# EAGLE board PCB-ARD-BOS2 (EAGLE 6.5.0)
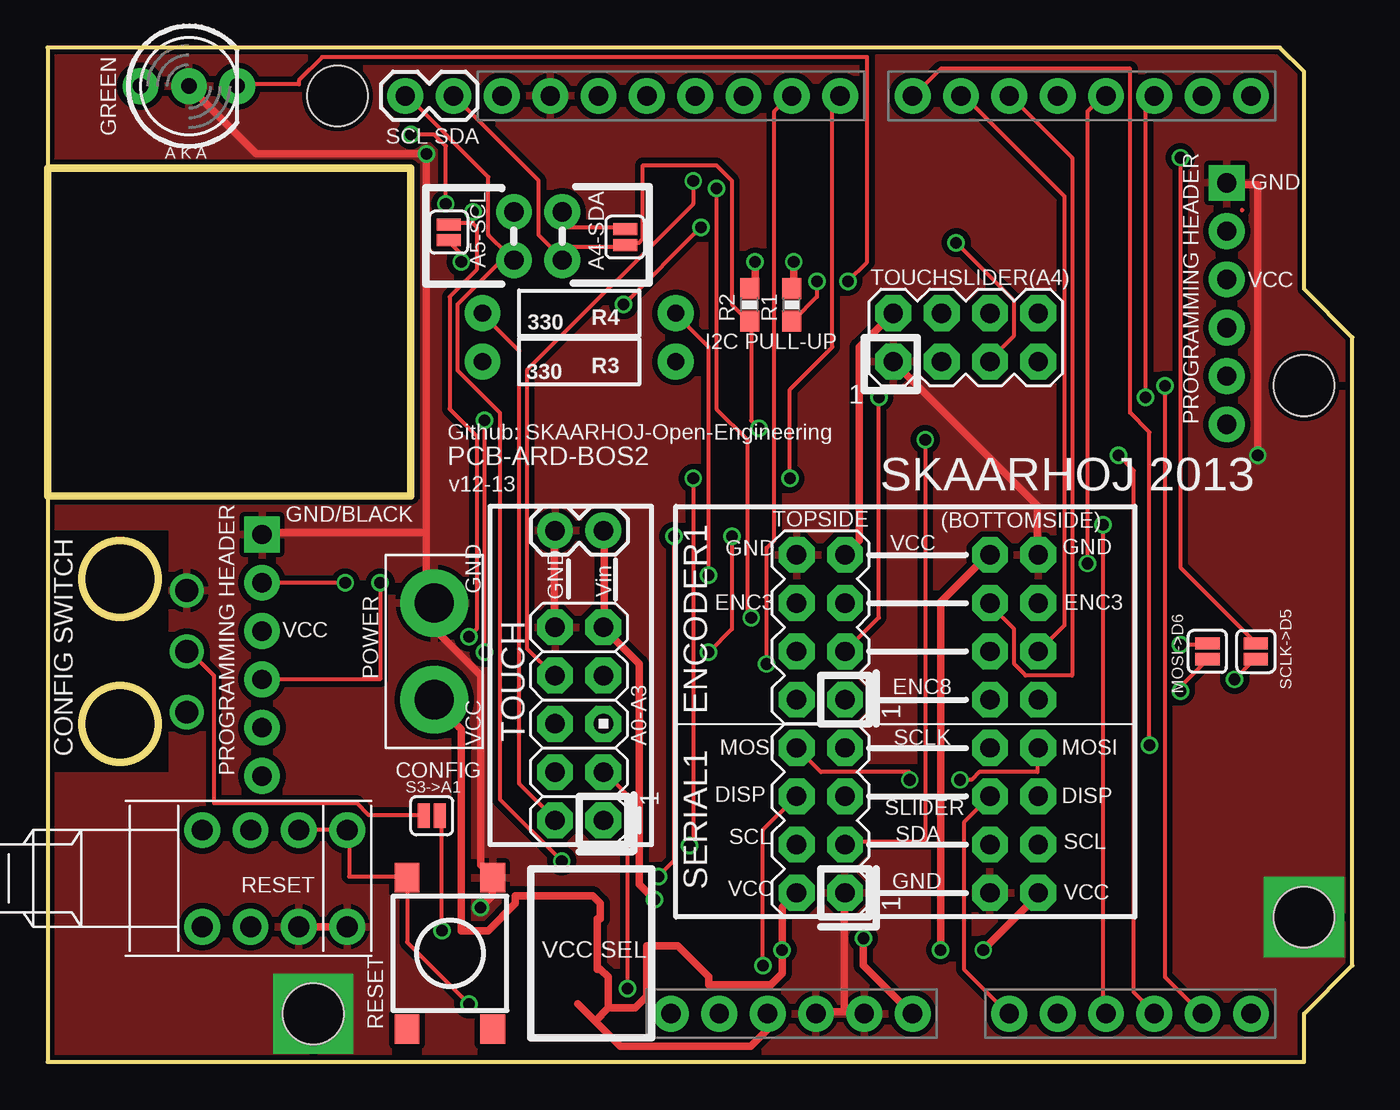
[diagram p0: board, top side]
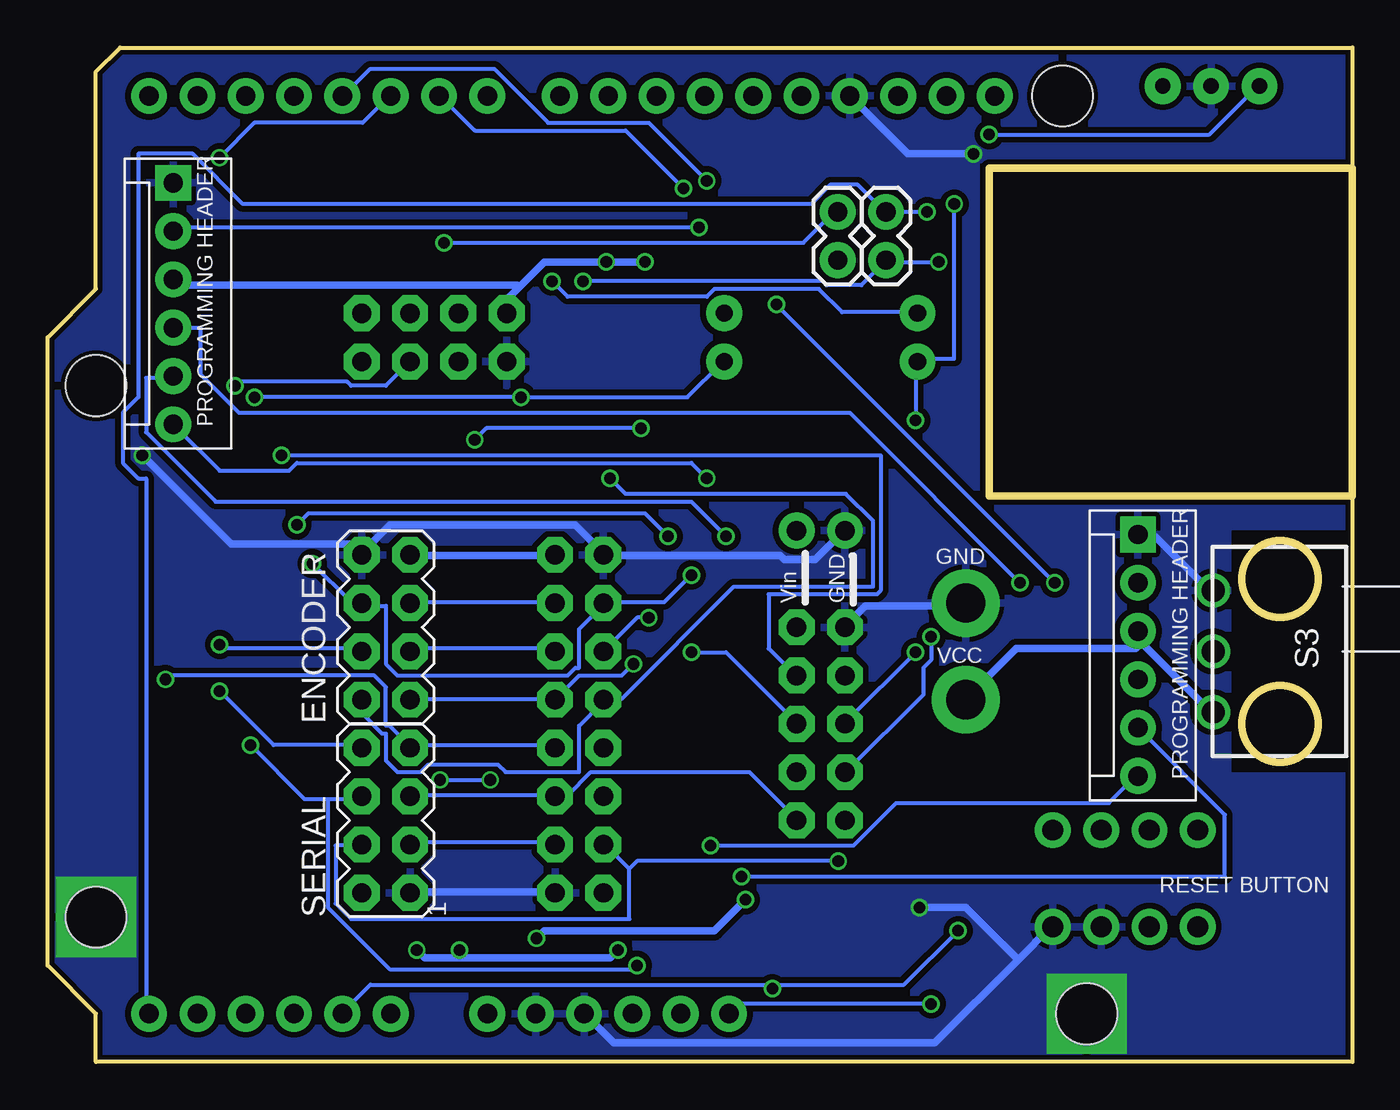
[diagram p1: board, bottom side, seen from below]

Size 68.58 x 53.34 mm. Coordinates in mm from the lower left corner, seen from the top.
Outline: 0,29.77 19.1,29.77 19.1,46.99 0,46.99 0,29.77
Outline: 0,0 0,29.77
Copper layers (1*16): Top 0.035mm / dielectric 1.5mm / Bottom 0.035mm
Design rules "Fusion_eagle_rule_v1.1": minimum track width 6mil, minimum drill 12mil, track to track 6mil, track to pad 6mil, pad to pad 6mil, via to via 6mil, smd to smd 0mil, copper to edge 10mil, drill to drill 10mil, minimum pad ring 10mil, minimum via ring 6mil, stop-mask expansion 2mil, vias tented up to drill 100mil, thermal gap 10mil
Net classes: 0 default: width 0.203 mm, drill 0.61 mm, clearance 0.203 mm; 1 Power: width 0.406 mm, drill 0.61 mm, clearance 0.305 mm
Holes 3.2 mm at 13.97,2.54
tRestrict: area 0,29.6 to 19.6,47.2; area 0,15.2 to 6.3,27.9
bRestrict: area 0,29.6 to 19.6,47.2; area 0,15.2 to 6.3,27.9
Milling: area 1.8,23.4 to 5.8,27.4; area 1.8,15.8 to 5.8,19.8

## Footprints (pad centres in the part's own frame; a part is rotated, then mirrored left to right if it is on the bottom)
2X4 = drill 1.016 pad 1.88 octagon: 1 -3.81,-1.27; 2 -3.81,1.27; 3 -1.27,-1.27; 4 -1.27,1.27; 5 1.27,-1.27; 6 1.27,1.27; 7 3.81,-1.27; 8 3.81,1.27
MOLEX-1X6 = drill 1.016 pad 1.88 square: 1 0,0 | drill 1.016 pad 1.88: 2 2.54,0; 3 5.08,0; 4 7.62,0; 5 10.16,0; 6 12.7,0
1X02 = drill 1.016 pad 1.88: 1 0,0; 2 2.54,0
AVR_ICSP = drill 1.016 pad 1.88 octagon: 1 -1.27,5.08; 2 1.27,5.08; 3 -1.27,2.54; 4 1.27,2.54; 5 -1.27,0; 6 1.27,0; 7 -1.27,-2.54; 8 1.27,-2.54; 9 -1.27,-5.08; 10 1.27,-5.08
1X02_XTRA_BIG = drill 2.057 pad 3.556: 1 -2.54,0; 2 2.54,0
SJ_2S = smd 0.635 x 1.27: 1 -0.412,0; 2 0.412,0
0603-RES = smd 1.1 x 1: 1 -0.85,0; 2 0.85,0
AXIAL-0.4 = drill 0.9 pad 1.88: P$1 -5.08,0; P$2 5.08,0
PUSHBUTTON = drill 1.1 pad 1.88: 1 2.54,2.54; 2 2.54,-2.54; 3 -2.54,2.54; 4 -2.54,-2.54
TECONNECTIVITY-DPST = drill 1.2: P$1 3,3.2; P$2 3,0; P$3 3,-3.2
TACTILE_SWITCH_TALL = smd 1.55 x 1.3: A1 -3.975,-2.25; A2 3.975,-2.25; B1 -3.975,2.25; B2 3.975,2.25
DUEMILANOVE_VIAS = drill 1.016 pad 1.88: 3.3V 50.8,13.97; 5V 50.8,16.51; A0 50.8,29.21; A1 50.8,31.75; A2 50.8,34.29; A3 50.8,36.83; A4 50.8,39.37; A5 50.8,41.91; AREF 2.54,2.54; D2 2.54,36.83; D3 2.54,34.29; D4 2.54,31.75; D5 2.54,29.21; D6 2.54,26.67; D7 2.54,24.13; D8 2.54,20.32; D9 2.54,17.78; D10 2.54,15.24; D11 2.54,12.7; D12 2.54,10.16; D13 2.54,7.62; GND@0 50.8,19.05; GND@1 50.8,21.59; GND@2 2.54,5.08; RES 50.8,11.43; RX 2.54,41.91; TX 2.54,39.37; VIN 50.8,24.13
LED5MM-BICOLOR = drill 0.813 pad 1.88: A2 2.54,0; A3 -2.54,0; K1 0,0
ARDUINO-OUTLINE = hole 3.2: 15.24,50.8; 66.04,35.56; 66.04,7.62

## Placement (x,y rotation side)
ENCODER  M04X2  [2X4]  50.8,22.86 90 bottom
ENCODER1  M04X2  [2X4]  40.64,22.86 90 top
JP1  [MOLEX-1X6]  61.98,46.23 270 bottom
JP2  [MOLEX-1X6]  11.27,27.74 270 bottom
JP3  [1X02]  21.34,50.8 180 top
JP4  [1X02]  26.67,27.94 0 top
JP5  [1X02]  24.51,42.16 90 bottom
JP6  [1X02]  27.05,42.16 90 bottom
JP7  M05X2PTH  [AVR_ICSP]  27.94,17.78 180 top
JP8  [1X02_XTRA_BIG]  20.32,21.59 270 top
MOSI->D6  SOLDERJUMPERNC  [SJ_2S]  60.96,21.59 90 top
R1  1K5  [0603-RES]  39.12,39.81 90 top
R2  1K5  [0603-RES]  36.89,39.81 90 top
R3  330  [AXIAL-0.4]  27.94,36.83 0 top
R4  330  [AXIAL-0.4]  27.94,39.37 0 top
S1  [PUSHBUTTON]  13.21,9.65 270 top
S2  [PUSHBUTTON]  10.67,9.65 270 top
S3  SWITCH-DPST  [TECONNECTIVITY-DPST]  4.32,21.59 180 bottom
S3->A1  SOLDERJUMPERNC  [SJ_2S]  20.19,12.95 0 top
S3->A2  SOLDERJUMPERNC  [SJ_2S]  21.08,43.62 90 top
S3->A3  SOLDERJUMPERNC  [SJ_2S]  30.35,43.37 90 top
S4  SWITCH-MOMENTARY-2  [TACTILE_SWITCH_TALL]  21.15,5.71 90 top
SCLK->D5  SOLDERJUMPERNC  [SJ_2S]  63.5,21.59 270 top
SERIAL  M04X2  [2X4]  50.8,12.7 90 bottom
SERIAL1  M04X2  [2X4]  40.64,12.7 90 top
TOUCHSLIDER(A4)  M04X2  [2X4]  48.26,38.1 0 top
U1  ARDUINO_SHIELDNO_SILK  [DUEMILANOVE_VIAS]  21.34,53.34 270 top
U$7  LEDBICOLOR-AKA  [LED5MM-BICOLOR]  7.43,51.31 0 top
U$8  [ARDUINO-OUTLINE]  0,0 0 top

## Library data of the parts
ENCODER ENCODER1 JP1-JP8 MOSI->D6 R1-R4 S3->A1-S3->A3 S4 SCLK->D5 SERIAL SERIAL1 TOUCHSLIDER(A4) U1 U$8 = SparkFun
S1-S3 U$7 = SKAARHOJ

## Nets
5V [Power]: ENCODER1.7 ENCODER.7 JP1.3 JP2.3 JP8.2 R1.2 R2.2 S3.P$1 SERIAL1.2 SERIAL.2 TOUCHSLIDER(A4).2 U1.5V
A0: JP7.1 SERIAL1.5 SERIAL.5 U1.A0
A1: JP7.3 S3->A1.2 U1.A1
A2: JP7.5 U1.A2
A3: JP7.7 U1.A3
A4: JP6.2 S3->A3.2 TOUCHSLIDER(A4).5 U1.A4
A5: JP5.2 JP7.4 S3->A2.2 U1.A5
D2: ENCODER1.3 ENCODER.3 R3.P$2 U1.D2
D3: ENCODER1.6 ENCODER.6 R4.P$2 U1.D3
D4: JP7.8 U1.D4
D5: ENCODER1.5 ENCODER.5 SCLK->D5.1 U1.D5
D6: ENCODER1.4 ENCODER.4 MOSI->D6.2 U1.D6
D7: SERIAL1.6 SERIAL.6 U1.D7
D8: ENCODER1.2 ENCODER.2 U1.D8
D9: ENCODER1.1 ENCODER.1 U1.D9
GND [Power]: ENCODER1.8 ENCODER.8 JP1.1 JP2.1 JP4.1 JP7.10 JP8.1 S1.1 S2.1 S3.P$3 S4.A2 SERIAL1.1 SERIAL.1 TOUCHSLIDER(A4).1 U1.GND@0 U1.GND@1 U1.GND@2 U$7.K1
I2C_SCL: JP3.2 JP5.1 R1.1 S3->A2.1 SERIAL1.4 SERIAL.4
I2C_SDA: JP3.1 JP6.1 R2.1 S3->A3.1 SERIAL1.3 SERIAL.3
MOSI: MOSI->D6.1 SERIAL1.8 SERIAL.8
N$1: JP1.2 JP2.2
N$2: S3->A1.1 S3.P$2
N$7: JP7.2 R4.P$1 U$7.A2
N$8: JP7.6 R3.P$1 U$7.A3
N$33: JP1.4 JP2.4
N$34: JP1.5 JP2.5
N$45: JP1.6 JP2.6
RESET: S1.3 S2.3 S4.B2 U1.RES
SCLK: SCLK->D5.2 SERIAL1.7 SERIAL.7
VIN [Power]: JP4.2 JP7.9 U1.VIN

## Tracks (layer width: path | path; a pad name or v marks a point on that pad's centre or on a via)
5V  (via drill 0.61)
  Top 0.406: 28.89,7.52 28.89,4.88 29.06,4.88 29.46,4.47 29.46,2.85 | 28.89,7.52 | v37.19,42.06 37.19,41.05 36.98,40.84 R2.2 | v39.22,42.06 39.22,40.84 R1.2 | ENCODER1.7 42.67,27.43 42.67,37.59 TOUCHSLIDER(A4).2 | JP8.2 20.32,18.9 21.74,17.48 21.74,6.91 23.16,6.91 24.59,8.33 24.59,8.74 28.65,8.74 29.06,8.33 29.06,7.52 28.89,7.52 | SERIAL1.2 38.61,8.13 v38.61,5.89 38.61,4.67 38,4.06 34.75,4.06 34.75,4.47 33.12,6.1 31.5,6.1 31.5,3.45 30.89,2.85 29.46,2.85 | v49.17,5.89 52.02,8.74 SERIAL.2 | v46.94,5.89 46.94,24.18 49.38,26.62 ENCODER.7 | U1.5V 37.85,1.71 36.96,0.83 30.1,0.83 28.77,2.15 | 28.77,2.15 27.88,3.05 | 29.46,2.85 28.77,2.15
  Bottom 0.406: ENCODER1.7 42.06,26.62 49.38,26.62 ENCODER.7 | v37.19,42.06 v39.22,42.06 42.47,42.06 43.79,40.74 | 43.79,40.74 44.3,40.23 44.3,39.42 TOUCHSLIDER(A4).2 | JP1.3 61.98,41.05 61.77,40.84 43.89,40.84 43.79,40.74 | S3.P$1 7.52,18.49 11.18,22.15 11.18,22.55 JP2.3 11.18,21.95 11.38,21.74 17.68,21.74 20.32,19.1 JP8.2 | v49.17,5.89 48.77,5.49 46.94,5.49 | 46.94,5.49 39.01,5.49 v38.61,5.89 | 46.94,5.49 v46.94,5.89
A0
  Top 0.203: SERIAL.5 48.16,12.6 48.16,4.88 50.39,2.64 U1.A0
  Bottom 0.203: JP7.1 29.26,12.8 31.7,15.24 40.03,15.24 41.25,14.02 41.86,14.02 SERIAL1.5 42.06,14.02 49.38,14.02 SERIAL.5
A1  (via drill 0.61)
  Top 0.203: v20.73,6.91 20.73,12.8 S3->A1.2 | v30.48,3.86 30.48,14.02 29.26,15.24 JP7.3
  Bottom 0.203: v20.73,6.91 23.57,4.06 30.48,4.06 | 30.48,4.06 51.61,4.06 53.03,2.64 U1.A1 | 30.48,4.06 v30.48,3.86
A2  (via drill 0.61)
  Top 0.203: v34.75,21.54 35.97,22.76 v35.97,27.64 | v55.47,28.25 55.47,2.64 U1.A2
  Bottom 0.203: v34.75,21.54 32.92,21.54 29.26,17.88 JP7.5 | v35.97,27.64 37.19,28.85 54.86,28.85 v55.47,28.25
A3  (via drill 0.61)
  Top 0.203: v56.29,31.9 57.1,31.09 57.1,3.66 58.12,2.64 U1.A3
  Bottom 0.203: v56.29,31.9 24.79,31.9 24.79,24.79 24.99,24.59 30.68,24.59 30.68,21.74 29.26,20.32 JP7.7
A4  (via drill 0.61)
  Top 0.203: S3->A3.2 30.28,43.89 27.23,43.89 27.23,44.7 JP6.2 | v58.73,35.56 58.73,4.47 60.55,2.64 U1.A4 | v47.75,43.08 50.8,40.03 50.8,38.2 49.58,36.98 TOUCHSLIDER(A4).5
  Bottom 0.203: v58.73,35.56 58.52,35.76 52.83,35.76 52.63,35.56 50.8,35.56 TOUCHSLIDER(A4).5 | v47.75,43.08 28.85,43.08 27.23,44.7 JP6.2
A5  (via drill 0.61)
  Top 0.203: 22.35,44.09 21.13,44.09 S3->A2.2 | v22.35,44.7 22.35,44.09 | v22.15,22.35 22.55,22.76 22.55,32.92 21.13,34.34 21.13,40.23 22.55,41.66 22.55,43.89 22.35,44.09
  Bottom 0.203: v22.35,44.7 JP5.2 24.59,44.7 26.01,46.13 27.43,46.13 28.45,45.11 58.32,45.11 60.96,47.75 63.8,47.75 63.8,34.95 64.62,34.14 64.62,31.5 63.8,30.68 63.4,30.68 63.4,2.64 U1.A5 | v22.15,22.35 22.15,21.13 22.55,20.73 22.55,19.3 26.62,15.24 JP7.4
D2  (via drill 0.61)
  Top 0.203: v43.69,34.95 43.69,23.37 ENCODER1.3 | v57.71,34.95 57.71,50.39 58.12,50.8 U1.D2
  Bottom 0.203: R3.P$2 33.12,36.78 34.95,34.95 v43.69,34.95 v57.71,34.95 | ENCODER.3 49.38,21.74 42.06,21.74 ENCODER1.3
D3  (via drill 0.61)
  Top 0.203: v34.75,25.6 34.75,37.59 33.12,39.22 R4.P$2 | v54.66,26.21 54.66,49.99 55.47,50.8 U1.D3
  Bottom 0.203: v34.75,25.6 36.17,24.18 39.22,24.18 ENCODER1.6 39.42,23.98 40.64,22.76 40.64,20.73 40.84,20.73 41.25,20.32 50.19,20.32 50.8,20.93 50.8,23.98 52.02,23.98 ENCODER.6 52.22,24.18 52.63,24.18 v54.66,26.21
D4  (via drill 0.61)
  Top 0.203: v33.93,46.33 33.93,45.11 25.2,36.37 25.2,21.74 26.62,20.32 JP7.8
  Bottom 0.203: v33.93,46.33 36.98,49.38 42.27,49.38 45.11,52.22 51.61,52.22 53.03,50.8 U1.D4
D5  (via drill 0.61)
  Top 0.203: v59.54,47.55 59.54,26.01 63.4,22.15 SCLK->D5.1 | ENCODER.5 49.58,23.98 50.8,22.76 50.8,20.93 51.41,20.32 53.85,20.32 53.85,47.55 50.6,50.8 U1.D5
  Bottom 0.203: ENCODER1.5 42.06,24.18 49.38,24.18 ENCODER.5 | v59.54,47.55 57.71,49.38 52.02,49.38 50.6,50.8 U1.D5
D6  (via drill 0.61)
  Top 0.203: v59.54,21.95 60.96,21.95 MOSI->D6.2 | v36.98,23.37 36.78,23.57 36.78,32.72 35.15,34.34 v35.15,45.92 | ENCODER.4 53.44,22.96 53.44,45.52 48.16,50.8 U1.D6
  Bottom 0.203: v59.54,21.95 59.33,21.74 52.22,21.74 ENCODER.4 | ENCODER1.4 37.59,23.37 v36.98,23.37 | v35.15,45.92 38.2,48.97 46.13,48.97 47.95,50.8 U1.D6
D7  (via drill 0.61)
  Top 0.203: SERIAL1.6 37.59,12.19 v37.59,5.08 | v57.91,16.66 57.91,33.12 56.9,34.14 56.9,52.22 46.94,52.22 45.52,50.8 U1.D7
  Bottom 0.203: v37.59,5.08 37.8,4.88 50.6,4.88 53.85,8.13 53.85,13.82 | 53.85,13.82 52.22,13.82 SERIAL.6 | v57.91,16.66 55.07,13.82 53.85,13.82
D8  (via drill 0.61)
  Top 0.203: U1.D8 41.25,50.39 41.25,37.59 39.01,35.36 v39.01,30.68
  Bottom 0.203: ENCODER.2 52.02,18.9 52.02,18.29 51,17.27 50.8,17.27 50.8,15.85 50.19,15.24 48.97,15.24 48.56,15.65 44.91,15.65 44.5,15.24 40.64,15.24 40.64,17.68 39.42,18.9 ENCODER1.2 39.22,19.1 38.41,19.1 32.51,24.99 25.2,24.99 25.2,28.45 26.62,29.87 38.2,29.87 v39.01,30.68
D9  (via drill 0.61)
  Top 0.203: v37.8,20.93 37.8,27.03 38.2,27.43 38.2,49.99 39.01,50.8 U1.D9
  Bottom 0.203: ENCODER.1 49.38,19.1 42.06,19.1 ENCODER1.1 40.64,20.32 38.41,20.32 v37.8,20.93
GND  (via drill 0.61, 3.2)
  Top 0.406: S1.1 S2.1 | 41.86,2.64 42.88,2.64 U1.GND@1 | 41.86,2.64 40.44,2.64 U1.GND@0 | 41.86,2.64 41.86,8.74 SERIAL1.1 | TOUCHSLIDER(A4).1 52.02,29.26 52.02,26.82 ENCODER.8 | v63.6,31.9 63.6,46.13 61.98,46.13 JP1.1 | JP7.10 26.62,22.96 26.62,27.84 JP4.1 | 19.91,27.84 19.91,24.59 20.32,24.18 JP8.1 20.32,22.76 22.76,20.32 22.76,10.36 23.37,9.75 S4.A2 23.37,9.55 23.37,8.74 v22.76,8.13 | 19.91,27.84 v19.91,47.75 10.97,47.75 7.52,51.21 U$7.K1 | 19.91,27.84 11.38,27.84 JP2.1
  Bottom 0.406: SERIAL.1 49.38,8.94 42.06,8.94 SERIAL1.1 | 17.58,5.38 21.95,1.02 38.81,1.02 40.23,2.44 U1.GND@0 | 17.58,5.38 15.85,7.11 S1.1 | v63.6,31.9 58.93,27.23 51.82,27.23 ENCODER.8 52.02,26.82 50.6,28.25 40.84,28.25 39.42,26.82 ENCODER1.8 39.22,26.62 30.07,26.62 29.87,26.42 28.25,26.42 26.82,27.84 JP4.1 | S3.P$3 7.52,24.79 10.36,27.64 11.18,27.64 JP2.1 | U1.GND@2 23.37,47.75 v19.91,47.75 | JP7.10 26.62,22.96 25.6,23.98 20.32,23.98 JP8.1 | 17.58,5.38 20.32,8.13 v22.76,8.13
  other vias: 13.97,2.54 66.04,7.62
  pour Bottom: 0,0 0,53.34 68.58,53.34 68.58,0
  pour Top: 0,0 0,53.34 68.58,53.34 68.58,0
I2C_SCL  (via drill 0.61)
  Top 0.203: v40.44,41.05 40.44,40.23 39.22,39.01 R1.1 | v21.74,42.06 21.74,42.47 21.13,43.08 S3->A2.1 | 24.18,42.47 24.38,42.27 JP5.1 24.18,42.47 | 24.18,42.47 23.16,43.48 23.16,46.53 18.9,50.8 JP3.2 | v27.03,10.57 23.77,13.82 23.77,34.14 21.54,36.37 21.54,39.83 24.18,42.47
  Bottom 0.203: 38,10.16 39.22,11.38 SERIAL1.4 | 38,10.16 38,7.52 52.63,7.52 53.44,8.33 53.44,11.38 52.22,11.38 SERIAL.4 | v40.44,41.05 27.84,41.05 27.64,40.84 25.81,40.84 24.59,42.06 JP5.1 24.38,42.06 v21.74,42.06 | 38,10.16 37.59,10.57 v27.03,10.57
I2C_SDA  (via drill 0.61)
  Top 0.203: JP3.1 25.81,46.33 25.81,43.48 27.03,42.27 JP6.1 27.23,42.27 27.23,42.88 30.28,42.88 S3->A3.1 30.48,43.08 31.09,43.08 31.29,43.28 31.29,47.14 35.15,47.14 35.97,46.33 35.97,39.83 36.78,39.01 R2.1 36.98,38.81 36.98,33.73 v37.39,33.33 | v46.13,32.72 46.13,11.58 42.06,11.58 SERIAL1.3
  Bottom 0.203: SERIAL1.3 42.06,11.58 49.38,11.58 SERIAL.3 | v46.13,32.72 45.52,33.33 v37.39,33.33
MOSI  (via drill 0.61)
  Top 0.203: v59.54,19.51 59.54,19.71 60.96,21.13 MOSI->D6.1 | SERIAL1.8 40.64,15.24 45.31,15.24 v45.31,14.83 | v47.95,14.83 48.56,14.83 48.97,15.24 52.02,15.24 52.02,16.46 SERIAL.8
  Bottom 0.203: v59.54,19.51 56.69,16.66 52.22,16.66 SERIAL.8 | v47.95,14.83 v45.31,14.83
N$1  (via drill 0.61)
  Top 0.203: v15.65,25.2 JP2.2 | v34.34,43.89 v30.28,39.83
  Bottom 0.203: v30.28,39.83 v15.65,25.2 | v34.34,43.89 61.77,43.89 JP1.2
N$2
  Top 0.203: S3->A1.1 19.71,13.01 16.87,13.01 16.26,13.61 8.74,13.61 8.74,20.32 7.52,21.54 S3.P$2
N$5
  Top 0.203: 62.79,44.81 62.79,44.78
N$7  (via drill 0.61)
  Top 0.203: R4.P$1 22.96,39.22 24.79,37.39 24.79,14.63 26.62,12.8 JP7.2 | v42.06,41.05 43.08,42.06 43.08,52.83 14.43,52.83 13.21,51.61 13.21,51.41 10.16,51.41 U$7.A2
  Bottom 0.203: v42.06,41.05 41.25,40.23 33.93,40.23 33.53,40.64 28.04,40.64 26.82,39.42 22.96,39.42 R4.P$1
N$8  (via drill 0.61)
  Top 0.203: v22.96,33.73 v22.96,21.54 | v19.1,48.77 20.32,48.77 20.93,48.16 v20.93,45.11
  Bottom 0.203: v22.96,21.54 26.62,17.88 JP7.6 | v22.96,33.73 22.96,36.78 R3.P$1 22.76,36.98 20.93,36.98 v20.93,45.11 | v19.1,48.77 7.52,48.77 5.08,51.21 U$7.A3
N$33  (via drill 0.61)
  Top 0.203: JP2.4 17.48,20.12 v17.48,25.2
  Bottom 0.203: v17.48,25.2 26.42,34.14 58.52,34.14 60.55,36.17 60.55,38.61 JP1.4
N$34  (via drill 0.61)
  Top 0.203: v32.11,9.75 32.92,10.57 v32.92,27.64
  Bottom 0.203: v32.11,9.75 6.71,9.75 6.71,13.01 11.18,17.48 JP2.5 | v32.92,27.64 34.75,29.46 59.74,29.46 63.4,33.12 63.4,35.97 61.98,35.97 JP1.5
N$45  (via drill 0.61)
  Top 0.203: v33.73,11.38 33.93,11.58 v33.93,30.68
  Bottom 0.203: v33.73,11.38 26.21,11.38 23.98,13.61 12.8,13.61 11.38,15.04 JP2.6 | v33.93,30.68 34.75,31.5 55.47,31.5 55.88,31.09 59.54,31.09 JP1.6
RESET  (via drill 0.61)
  Top 0.203: v22.15,3.05 18.9,6.3 18.9,9.55 S4.B2 18.69,9.75 15.85,9.75 15.85,12.19 S1.3 S2.3
  Bottom 0.203: v22.15,3.05 32.31,3.05 32.72,2.64 U1.RES
SCLK  (via drill 0.61)
  Top 0.203: v62.38,20.12 63.4,21.13 SCLK->D5.2
  Bottom 0.203: v62.38,20.12 62.18,20.32 51.41,20.32 50.8,19.71 50.8,17.68 50.6,17.68 49.58,16.66 SERIAL.7 49.38,16.66 42.06,16.66 SERIAL1.7
VIN  (via drill 0.61)
  Top 0.406: v42.88,6.5 42.88,5.08 45.31,2.64 U1.VIN | v31.9,8.53 31.09,9.35 31.09,20.93 29.26,22.76 JP7.9 29.26,22.96 29.26,27.84 JP4.2
  Bottom 0.406: v42.88,6.5 42.47,6.91 33.53,6.91 v31.9,8.53

## Text on the board
_tsilk: GREEN | SCL | SDA | A5-SCL | A4-SDA | GND | VCC | I2C PULL-UP | 1 | PROGRAMMING HEADER | Github: SKAARHOJ-Open-Engineering | PCB-ARD-BOS2 | v12-13 | SKAARHOJ 2013 | GND/BLACK | TOPSIDE | VCC | (BOTTOMSIDE) | GND | GND | GND | GND | Vin | ENC3 | ENC3 | VCC | POWER | ENC8 | 1 | VCC | TOUCH | A0-A3 | SCLK | CONFIG SWITCH | MOSI | MOSI | PROGRAMMING HEADER | CONFIG | DISP | SLIDER | DISP | 1 | SDA | SCL | SCL | GND | RESET | VCC | VCC | 1 | VCC SEL | RESET
_bsilk: PROGRAMMING HEADER | GND | GND | Vin | VCC | PROGRAMMING HEADER | RESET BUTTON | 1